# Altium PCB Clock.PcbDoc (part 1 of 2)
Units mil, origin at the board's own origin, x right, y up, seen from the top; angles counter-clockwise.
Board outline 5314.96 x 2362.2 mil, 2 copper layers (Top Layer, Bottom Layer); 149 components, 176 nets, 886 pads, 8 vias.
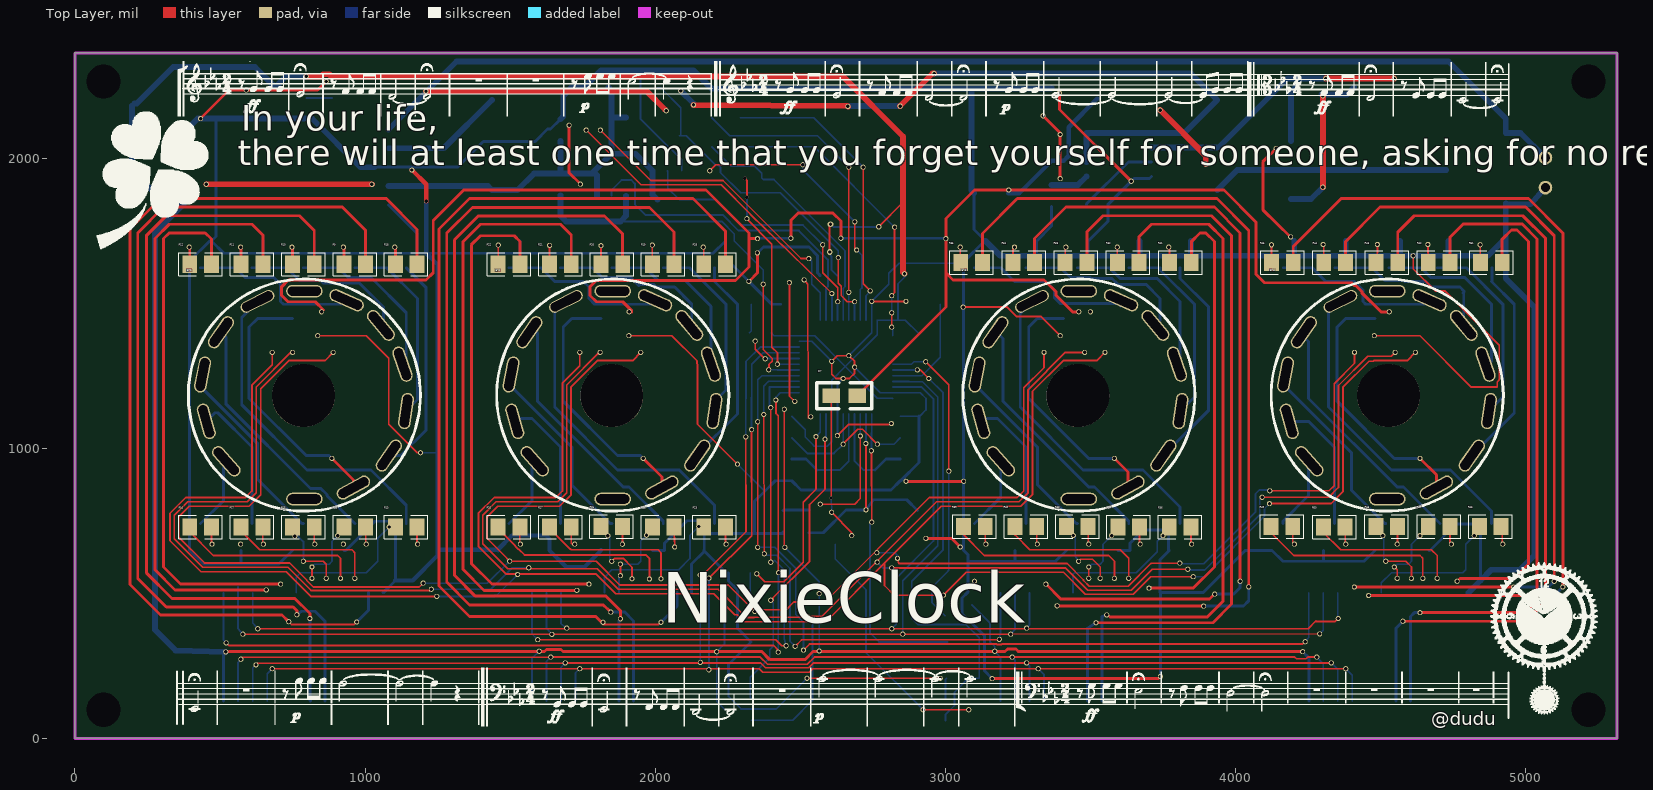
[diagram p0: Top Layer view]
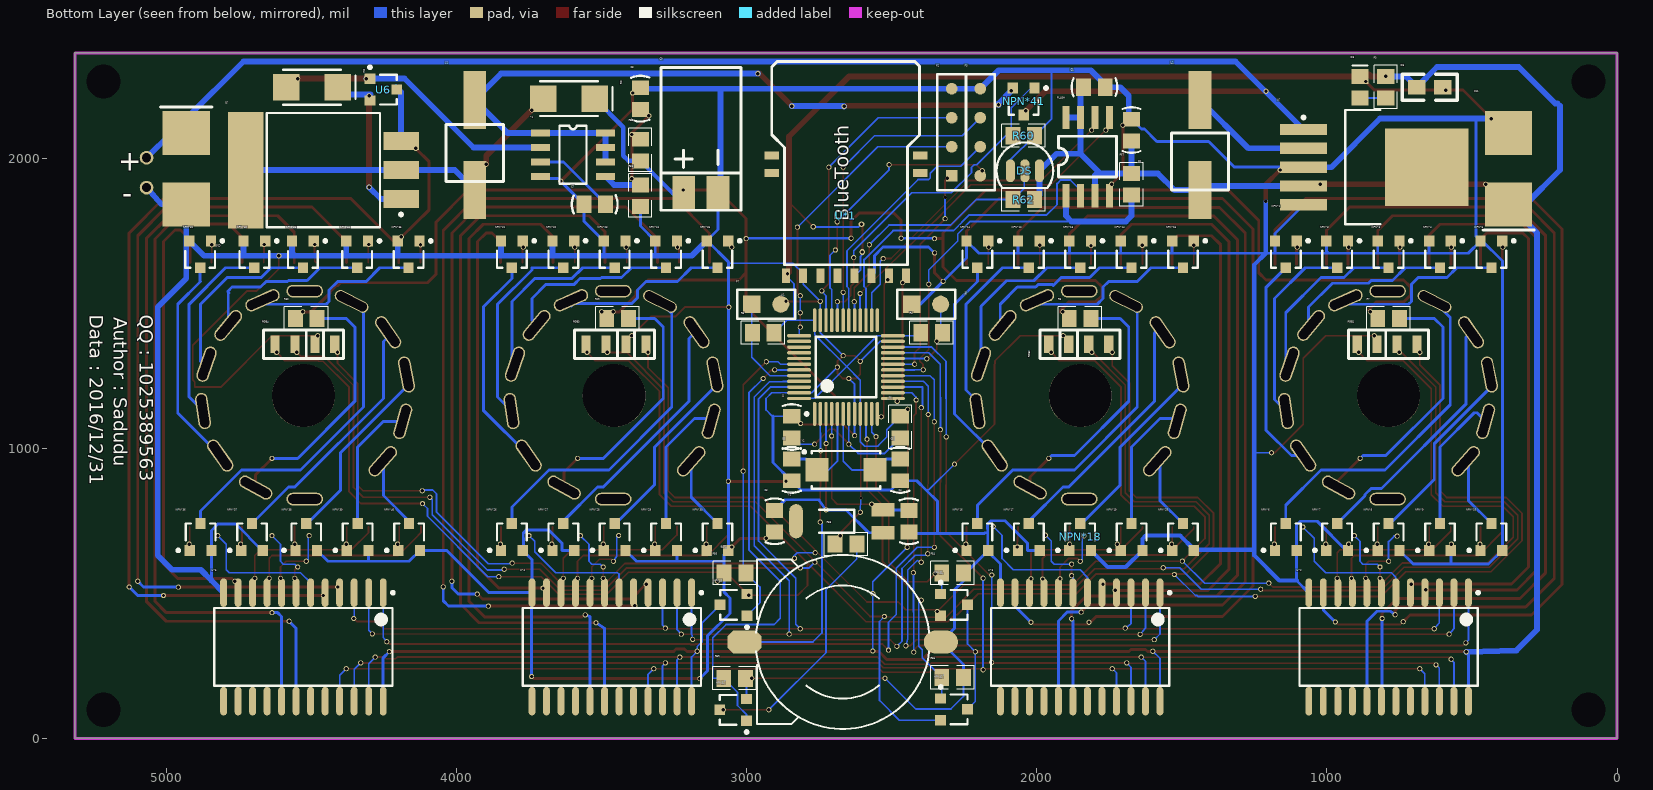
[diagram p1: Bottom Layer view, seen from below]

## Layer stack, top to bottom
Top Solder: solder mask 0.4, Solder Resist, Dk 3.5
Top Layer: signal copper 1.4
Dielectric 1: dielectric 12.6, FR-4, Dk 4.8
Bottom Layer: signal copper 1.4
Bottom Solder: solder mask 0.4, Solder Resist, Dk 3.5

## Board outline
0,0 0,2362.2 5314.96,2362.2 5314.96,0

## Design rules (kind name [scope] priority, off if disabled: settings)
Clearance [All] p1: gap=6
HoleSize [All] p1: absolutevalues=TRUE maxlimit=314.96 minlimit=1 maxpercent=80.000 minpercent=20.000
MinimumSolderMaskSliver [All] p1: minsoldermaskwidth=5
PolygonConnect [All] p1: connectstyle=Relief reliefconductorwidth=10 reliefentries=4 polygonreliefangle="90 Angle" airgapwidth=10
RoutingVias [All] p1: holewidth=28 width=50 viastyle="Through Hole" minholewidth=28 minwidth=50 maxholewidth=150 maxwidth=200
SilkToBoardRegionClearance [All] p1 off:
SilkToSilkClearance [All] p1 off: silktosilkclearance=10
SilkToSolderMaskClearance [IsPad] p1 off: minsilkscreentomaskgap=10 clearancetoexposedcopper=TRUE
SolderMaskExpansion [All] p1: expansion=4
UnpouredPolygon [All] p1: allowunpoured=FALSE
Width [All] p1: maxlimit=100 minlimit=6 preferedwidth=10
24 further rules are at their usual default settings.

## Components (designator, comment, footprint, x,y, rotation, side; value= is the part's Value field where it differs from the comment)
*1 "MC34063" SOP-8 3710.63,2086.61 r180 bottom
BAT? "BATT" BAT 2600,470 r270 bottom
C1 "Cap" C-RAD-0805 1801.18,2244.09 r0 bottom
C2 "Cap" C-RAD-0805 1673.23,2096.46 r270 bottom
C3 "Cap" C-RAD-0805 2903.54,748.03 r90 bottom
C4 "Cap" C-RAD-0805 2440.94,748.03 r90 bottom
C5 "Cap" C-RAD-0805 2470.47,925.2 r90 bottom
C6 "Cap" C-RAD-0805 2844.49,925.2 r90 bottom
C7 "Cap" C-RAD-0805 3523.62,1840.55 r0 bottom
C8 "Cap" C-RAD-0805 3366.14,2204.72 r270 bottom
C9 "Cap Pol" CAP4 3020,1820 r90 bottom
C10 "220uF" CAP7343 4931.1,1968.5 r270 bottom
C11 "220uF" CAP7343 374.02,1958.66 r90 bottom
D3 "LED0" LED_0805 885.83,2244.09 r90 bottom
D4 "Diode" DIODE-SMA 4498.03,2244.09 r180 bottom
D5 "Diode" DIODE-SMA 3612.2,2204.72 r180 bottom
D6 "Diode" 0805 600.39,2244.09 r0 bottom
D7 "Diode" 0805 2696.85,1181.1 r180 top
DS "DS18B20" TO-92A 2041,1956 r270 bottom
E*1 "SZ-8" SZ-8 787.4,1181.1 r0 top
E*2 "SZ-8" SZ-8 1850.39,1181.1 r0 top
E*3 "SZ-8" SZ-8 3456.69,1181.1 r0 top
E*4 "SZ-8" SZ-8 4519.69,1181.1 r0 top
FLASH "W25Q128" SOIC-8 1899.61,1870.08 r90 bottom
J1 "Cap" C-RAD-0805 2844.49,1072.83 r270 bottom
L1 "990uH" L55#1 4035.43,1919.29 r90 bottom
L2 "990uH" L55#2 1535.43,1889.76 r90 bottom
NPN41 "NPN_mini" SOT-23r 2290,460 r270 bottom
NPN42 "NPN_mini" SOT-23r 2290,100 r270 bottom
NPN43 "NPN_mini" SOT-23r 3040,460 r90 bottom
NPN44 "NPN_mini" SOT-23r 3041.34,98.43 r90 bottom
NPN*1 "NPN_mini" SOT-23r 1141.73,1673.23 r0 bottom
NPN*2 "NPN_mini" SOT-23r 964.57,1673.23 r0 bottom
NPN*3 "NPN_mini" SOT-23r 787.4,1673.23 r0 bottom
NPN*4 "NPN_mini" SOT-23r 610.24,1673.23 r0 bottom
NPN*5 "NPN_mini" SOT-23r 433.07,1673.23 r0 bottom
NPN*6 "NPN_mini" SOT-23r 1141.73,688.98 r180 bottom
NPN*7 "NPN_mini" SOT-23r 964.57,688.98 r180 bottom
NPN*8 "NPN_mini" SOT-23r 787.4,688.98 r180 bottom
NPN*9 "NPN_mini" SOT-23r 610.24,688.98 r180 bottom
NPN*10 "NPN_mini" SOT-23r 433.07,688.98 r180 bottom
NPN*11 "NPN_mini" SOT-23r 2204.72,1673.23 r0 bottom
NPN*12 "NPN_mini" SOT-23r 2027.56,1673.23 r0 bottom
NPN*13 "NPN_mini" SOT-23r 1850.39,1673.23 r0 bottom
NPN*14 "NPN_mini" SOT-23r 1673.23,1673.23 r0 bottom
NPN*15 "NPN_mini" SOT-23r 1496.06,1673.23 r0 bottom
NPN*16 "NPN_mini" SOT-23r 2204.72,688.98 r180 bottom
NPN*17 "NPN_mini" SOT-23r 2027.56,688.98 r180 bottom
NPN*18 "NPN_mini" SOT-23r 1850.39,688.98 r180 bottom
NPN*19 "NPN_mini" SOT-23r 1673.23,688.98 r180 bottom
NPN*20 "NPN_mini" SOT-23r 1496.06,688.98 r180 bottom
NPN*21 "NPN_mini" SOT-23r 3809.06,1673.23 r0 bottom
NPN*22 "NPN_mini" SOT-23r 3631.89,1673.23 r0 bottom
NPN*23 "NPN_mini" SOT-23r 3454.72,1673.23 r0 bottom
NPN*24 "NPN_mini" SOT-23r 3277.56,1673.23 r0 bottom
NPN*25 "NPN_mini" SOT-23r 3100.39,1673.23 r0 bottom
NPN*26 "NPN_mini" SOT-23r 3809.06,688.98 r180 bottom
NPN*27 "NPN_mini" SOT-23r 3631.89,688.98 r180 bottom
NPN*28 "NPN_mini" SOT-23r 3454.72,688.98 r180 bottom
NPN*29 "NPN_mini" SOT-23r 3277.56,688.98 r180 bottom
NPN*30 "NPN_mini" SOT-23r 3100.39,688.98 r180 bottom
NPN*31 "NPN_mini" SOT-23r 4883.54,1672.99 r0 bottom
NPN*32 "NPN_mini" SOT-23r 4696.54,1672.99 r0 bottom
NPN*33 "NPN_mini" SOT-23r 4529.21,1672.99 r0 bottom
NPN*34 "NPN_mini" SOT-23r 4342.2,1672.99 r0 bottom
NPN*35 "NPN_mini" SOT-23r 4165.04,1672.99 r0 bottom
NPN*36 "NPN_mini" SOT-23r 4881.89,688.98 r180 bottom
NPN*37 "NPN_mini" SOT-23r 4704.72,688.98 r180 bottom
NPN*38 "NPN_mini" SOT-23r 4517.72,688.98 r180 bottom
NPN*39 "NPN_mini" SOT-23r 4340.55,688.98 r180 bottom
NPN*40 "NPN_mini" SOT-23r 4163.39,688.98 r180 bottom
NPN*41 "NPN_mini" SOT-23r 2045,2200 r0 bottom
P2 "Header 4" HDR4X1_A#1 2293.31,1938.98 r90 bottom
P3 "Header 4" HDR4X1_A#2 2194.88,1938.98 r90 bottom
P6 "Header 2" HDR2X1_A 2431.1,1496.06 r180 bottom
P7 "Header 2" HDR2X1_A 2982.28,1496.06 r180 bottom
Q? "MOSFET-N" SOT263 4458.66,1958.66 r0 bottom
R3 "Res1" 0805-1 797.24,2244.09 r90 bottom
R4 "Res1" 0805-1 2362.2,1397.64 r0 bottom
R5 "Res1" 0805-1 2942.91,1397.64 r180 bottom
R6 "Res1" 0805-1 2470.47,1072.83 r90 bottom
R7 "Res1" 0805-1 787.4,1446.85 r0 bottom
R8 "Res1" 0805-1 1850.39,1446.85 r0 bottom
R9 "Res1" 0805-1 964.57,1633.86 r180 top
R10 "Res1" 0805-1 787.4,1633.86 r180 top
R11 "Res1" 0805-1 610.24,1633.86 r180 top
R12 "Res1" 0805-1 433.07,1633.86 r180 top
R13 "Res1" 0805-1 1141.73,728.35 r0 top
R14 "Res1" 0805-1 964.57,728.35 r0 top
R15 "Res1" 0805-1 787.4,728.35 r0 top
R16 "Res1" 0805-1 433.07,728.35 r0 top
R17 "Res1" 0805-1 610.24,728.35 r0 top
R18 "Res1" 0805-1 1141.73,1633.86 r180 top
R19 "Res1" 0805-1 2027.56,1633.86 r180 top
R20 "Res1" 0805-1 1850.39,1633.86 r180 top
R21 "Res1" 0805-1 1673.23,1633.86 r180 top
R22 "Res1" 0805-1 1496.06,1633.86 r180 top
R23 "Res1" 0805-1 2204.72,728.35 r0 top
R24 "Res1" 0805-1 2027.56,728.35 r0 top
R25 "Res1" 0805-1 1850,730 r0 top
R26 "Res1" 0805-1 1496.06,728.35 r0 top
R27 "Res1" 0805-1 1673.23,728.35 r0 top
R28 "Res1" 0805-1 2204.72,1633.86 r180 top
R29 "Res1" 0805-1 3444.88,1446.85 r0 bottom
R30 "Res1" 0805-1 4517.72,1446.85 r0 bottom
R32 "Res1" 0805-1 3630.16,1640 r180 top
R33 "Res1" 0805-1 3450.16,1640 r180 top
R34 "Res1" 0805-1 3270.16,1640 r180 top
R35 "Res1" 0805-1 3090.16,1640 r180 top
R36 "Res1" 0805-1 3809.06,728.35 r0 top
R37 "Res1" 0805-1 3631.83,728.35 r0 top
R38 "Res1" 0805-1 3454.61,730 r0 top
R39 "Res1" 0805-1 3100.16,730 r0 top
R40 "Res1" 0805-1 3277.38,730 r0 top
R41 "Res1" 0805-1 3810.16,1640 r180 top
R42 "Res1" 0805-1 4701.65,1639.76 r180 top
R43 "Res1" 0805-1 4521.65,1639.76 r180 top
R44 "Res1" 0805-1 4341.65,1639.76 r180 top
R45 "Res1" 0805-1 4161.65,1639.76 r180 top
R46 "Res1" 0805-1 4877.95,730.32 r0 top
R47 "Res1" 0805-1 4701.42,730 r0 top
R48 "Res1" 0805-1 4520.94,730 r0 top
R49 "Res1" 0805-1 4160,730 r0 top
R50 "Res1" 0805-1 4340.47,728.35 r0 top
R51 "Res1" 0805-1 4881.65,1639.76 r180 top
R52 "Res1" 0805-1 3366.14,2027.56 r90 bottom
R53 "Res1" 0805-1 3366.14,1870.08 r270 bottom
R54 "Res1" 0805-1 2290,570 r180 bottom
R55 "Res1" 0805-1 2290,210 r180 bottom
R56 "Res1" 0805-1 3040,570 r0 bottom
R57 "Res1" 0805-1 1673.23,1909.45 r270 bottom
R58 "Res1" 0805-1 2657.48,669.29 r180 bottom
R59 "Res1" 0805-1 3041.34,206.69 r180 bottom
R60 "Res1" 0805-1 2045,2077 r180 bottom
R62 "Res1" 0805-1 2045,1857 r180 bottom
RGB1 "RGB_LED" RGB 698.82,1358.27 r0 bottom
RGB2 "RGB_LED" RGB 1761.81,1358.27 r0 bottom
RGB3 "RGB_LED" RGB 3543.31,1358.27 r180 bottom
RGB4 "RGB_LED" RGB 4616.14,1358.27 r180 bottom
U1 "STM32F103C8T6" LQFP-48_M 2657.48,1279.53 r90 bottom
U6 "S9015" SOT-23r 4257,2236 r270 bottom
U*1 "BT1" BT1 2657.48,1948.82 r90 bottom
U*2 "CD4514" SOIC24 787.4,314.96 r270 bottom
U*3 "CD4514" SOIC24 1850.39,314.96 r270 bottom
U*4 "CD4514" SOIC24 3464.57,314.96 r270 bottom
U*5 "CD4514" SOIC24 4527.56,314.96 r270 bottom
U? "U5" TO263-5 836.61,1968.5 r180 bottom
Y1 "XTAL_SM" X-TC15 2529.53,748.03 r270 bottom
Y2 "XTAL" 5032 2657.48,925.2 r180 bottom

## Footprints (in the part's own frame and the unit in brackets; to place one, negate y for a bottom-side part, rotate by r counter-clockwise, add the part's x,y. Pads: shape width x height; smd on the part's side, far side on the other; paste and mask are expansions set on the pad)
0805 [mil]
  rect 60x50 smd: 1(0,-0.06) 2(90,-0.06)
  silkscreen extent -50,-45 140,45
0805-1 [mm] "贴片带丝印"
  rect 1.3x1.5 smd: 1(-0.95,0) 2(0.95,0)
  silkscreen extent -1.91,-1.02 1.91,1.02, body extent -1.14,-0.51 1.14,0.51, height 1
5032 [mm] "XTAL_8M 2-Leads, Body 6.00x3.20mm, IPC Medium Density"
  rect 2x2.05 smd: 1(-2.55,0) 2(2.55,0)
  silkscreen extent -3.78,-1.65 3,1.7, body extent -3,-1.6 3,1.6, height 1.2
BAT [mm]
  oct 2x3 smd: 1(3.5,-10.352)
  oval 2x3 smd: 2(3.5,6.848)
  silkscreen extent -4.12,-9.33 11.12,5.82
BT1 [mm]
  rect 0.7x1.3 smd: 1(1.5,6.5) 2(0,6.5) 21(0,-6.5) 22(1.5,-6.5)
  rect 1.3x0.7 smd: 8(-9,5.25) 9(-9,3.75) 10(-9,2.25) 11(-9,0.75) 12(-9,-0.75) 13(-9,-2.25) 14(-9,-3.75) 15(-9,-5.25)
  silkscreen extent -8.04,-6.42 9.76,6.5
C-RAD-0805 [mm] "贴片电容"
  rect 1.3x1.5 smd: 1(-0.95,0) 2(0.95,0)
  silkscreen extent -2,-0.79 2,0.79, body extent -1.27,-0.64 1.27,0.64, height 0.9
CAP4 [mm]
  rect 3x2 smd: 1(1.5,5) 2(1.5,2)
  silkscreen extent 0,0 12.5,7
CAP7343 [mm] "Aluminum Electrolytic Capacitor, Body 7.15x4.40x4.00mm, IPC Low Density"
  rect 3.85x4.15 smd: 1(-3,0) 2(3.25,0)
  silkscreen extent -5.25,-2.25 -5.25,2.25, body extent -3.65,-2.25 3.65,2.25, height 4
DIODE-SMA [mm] "贴片二极管"
  rect 2.3x2.3 smd: 1(-2.25,0) 2(2.25,0)
  silkscreen extent -2.54,-1.52 3.81,1.52, body extent -2.92,-1.4 2.92,1.4, height 3
HDR2X1_A [mm] "Connector; Header; 2 Position"
  rect 1.5x1.5 smd: 1(0,0)
  round 1.5 smd: 2(2.54,0)
  silkscreen extent -1.27,-1.27 3.81,1.27
HDR4X1_A#1 [mil] "Connector; Header; 4 Position"
  rect 40x40 smd: 1(0,0)
  round 40 smd: 2(100,0) 3(200,0) 4(300,0)
  silkscreen extent -50,-50 350,50
HDR4X1_A#2 [mil] "Connector; Header; 4 Position"
  round 40 smd: 1(0,0) 2(100,0) 3(200,0) 4(300,0)
  silkscreen extent -50,-50 350,50
L55#1 [mm]
  rect 5.08x2 smd: 1(-0.744,-2.5) 2(7.13,-2.5)
  silkscreen extent 0,-5 5,0
L55#2 [mm]
  rect 5.08x2 smd: 1(0,-2.5) 2(7.874,-2.5)
  silkscreen extent 0,-5 5,0
LED_0805 [mm] "贴片二极管"
  rect 1.3x1.5 smd: 1(-0.95,0) 2(0.95,0)
  silkscreen extent 1.91,-0.64 1.91,0.63
LQFP-48_M [mm] "Thin QFP, 48-Leads, Body 7x7mm, Pitch 0.5mm, IPC Low Density"
  oval 2.1x0.3 smd: 1(-4.1,2.75) 2(-4.1,2.25) 3(-4.1,1.75) 4(-4.1,1.25) 5(-4.1,0.75) 6(-4.1,0.25) 7(-4.1,-0.25) 8(-4.1,-0.75) 9(-4.1,-1.25) 10(-4.1,-1.75) 11(-4.1,-2.25) 12(-4.1,-2.75) 25(4.1,-2.75) 26(4.1,-2.25) 27(4.1,-1.75) 28(4.1,-1.25) 29(4.1,-0.75) 30(4.1,-0.25) 31(4.1,0.25) 32(4.1,0.75) 33(4.1,1.25) 34(4.1,1.75) 35(4.1,2.25) 36(4.1,2.75)
  oval 0.3x2.1 smd: 13(-2.75,-4.1) 14(-2.25,-4.1) 15(-1.75,-4.1) 16(-1.25,-4.1) 17(-0.75,-4.1) 18(-0.25,-4.1) 19(0.25,-4.1) 20(0.75,-4.1) 21(1.25,-4.1) 22(1.75,-4.1) 23(2.25,-4.1) 24(2.75,-4.1) 37(2.75,4.1) 38(2.25,4.1) 39(1.75,4.1) 40(1.25,4.1) 41(0.75,4.1) 42(0.25,4.1) 43(-0.25,4.1) 44(-0.75,4.1) 45(-1.25,4.1) 46(-1.75,4.1) 47(-2.25,4.1) 48(-2.75,4.1)
  silkscreen extent -4.22,-2.65 2.65,3.57, body extent -3.5,-3.5 3.5,3.5, height 1.6
RGB [mm]
  rect 0.8x1.5 smd: 1(-0.25,0) 2(1.5,0) 3(3.25,0) 4(5,0)
  silkscreen extent -1.25,-1.25 5.75,1.25
SOIC24 [mm] "SOIC, 24-Leads, Body 15.40x7.50mm, Pitch 1.27mm, IPC Medium Density"
  oval 2.5x0.6 smd: 1(-4.75,6.985) 2(-4.75,5.715) 3(-4.75,4.445) 4(-4.75,3.175) 5(-4.75,1.905) 6(-4.75,0.635) 7(-4.75,-0.635) 8(-4.75,-1.905) 9(-4.75,-3.175) 10(-4.75,-4.445) 11(-4.75,-5.715) 12(-4.75,-6.985) 13(4.75,-6.985) 14(4.75,-5.715) 15(4.75,-4.445) 16(4.75,-3.175) 17(4.75,-1.905) 18(4.75,-0.635) 19(4.75,0.635) 20(4.75,1.905) 21(4.75,3.175) 22(4.75,4.445) 23(4.75,5.715) 24(4.75,6.985)
  silkscreen extent -4.87,-7.8 3.4,7.96, body extent -3.8,-7.8 3.8,7.8, height 2.65
SOIC-8 [mil]
  rect 80x24 smd: 1(0,0) 2(0,-50.06) 3(0,-100.06) 4(0,-150.06) 5(270,-150) 6(270,-100) 7(270,-50) 8(270,0)
  silkscreen extent 65,-175 205,25
SOP-8 [mil]
  rect 65x25 smd: 1(0,0) 2(0,-50) 3(0,-100) 4(0,-150) 5(224.41,-150) 6(224.41,-100) 7(224.41,-50) 8(224.41,0)
  silkscreen extent 65,-175 159,25
SOT263 [mm]
  rect 3.1x1.6 smd: D(-6.8,0) G(-6.8,2.54) S(-6.8,-2.54)
  rect 3.1x10.2 smd: D(6.8,0)
  silkscreen extent -6.92,-5 4.95,5, body extent -4.5,-5 4.5,5, height 4
SOT-23r [mm]
  rect 0.9x0.95 smd: 1(-0.95,-1.048) 2(0.95,-1.048) 3(0,1.302)
  silkscreen extent -2.07,-1.17 1.3,1.3
SZ-8 [mm]
  oval 3.2x1.1 hole 0.8 slot 2.9 at 0 deg: 1(0.081,-9.051) 8(0.081,9.149)
  oval 3.2x1.1 hole 0.8 slot 2.9 at 29 deg rot 29: 2(4.381,-8.051)
  oval 3.2x1.1 hole 0.8 slot 2.9 at 55 deg rot 55: 3(7.481,-5.251) 10(-7.219,5.549)
  oval 3.2x1.1 hole 0.8 slot 2.9 at 82 deg rot 82: 4(8.981,-1.351)
  oval 3.2x1.1 hole 0.8 slot 2.9 at 109 deg rot 109: 5(8.681,2.749)
  oval 3.2x1.1 hole 0.8 slot 2.9 at 130 deg rot 130: 6(6.781,6.149)
  oval 3.2x1.1 hole 0.8 slot 2.9 at 156 deg rot 156: 7(3.781,8.349)
  oval 3.2x1 hole 0.8 slot 2.9 at 27 deg rot 27: 9(-4.019,8.249)
  oval 3.2x1.1 hole 0.8 slot 2.9 at 79 deg rot 79: 11(-8.819,1.849)
  oval 3.2x1.1 hole 0.8 slot 2.9 at 106 deg rot 106: 12(-8.5,-2.25)
  oval 3.2x1.1 hole 0.8 slot 2.9 at 132 deg rot 132: 13(-6.75,-5.75)
  silkscreen extent -10.08,-10.11 10.24,10.21
TO263-5 [mm] "D2-PAK, 6-Pads, Body 7.60x8.36mm (max), IPC Medium Density"
  rect 4.1x1 smd: 1(-6.2,3.3) 2(-6.2,1.65) 3(-6.2,0) 4(-6.2,-1.65) 5(-6.2,-3.3)
  rect 7.3x6.8 smd: 6(4.6,0)
  silkscreen extent -6.32,-5 0.55,5, body extent -2.55,-5 6.45,5, height 4.5
TO-92A [mm]
  oval 2x0.8 smd: 1(0,-1.27) 2(0,0) 3(0,1.27)
  silkscreen extent -2.48,-2.48 1.5,2.48
X-TC15 [mm] "圆柱晶振1"
  rect 1.2x2 smd: 1(-1,0) 2(1,0)
  oval 3x1.2 smd: 3(0,-7.62)
  silkscreen extent -1.02,-5.59 1.02,-2.54, body extent -1,-8.29 1,0, height 1.99

## Part data
BAT?: library part BAT
C1 C2 C3 C4 C5 C6 C7 C8 J1: "无极性电容"
C9: "极性电解电容"
C10 C11: library part CAP
D3: "发光二极管"
D4 D5 D6 D7: "二极管"
DS: "温度传感器"
FLASH: library part W25X16, "W25X16;SST25VF016;MX25L1605"
L1 L2: library part L_SOP
P2 P3 P6 P7: "接插件"
Q?: "N-Channel MOSFET"
R3 R4 R5 R6 R7 R8 R9 R10 R11 R12 R13 R14 R15 R16 R17 R18 R19 R20 R21 R22 R23 R24 R25 R26 R27 R28 R29 R30 R32 R33 R34 R35 R36 R37 R38 R39 R40 R41 R42 R43 R44 R45 R46 R47 R48 R49 R50 R51 R52 R53 R54 R55 R56 R57 R58 R59 R60 R62: "贴片电阻"
U1: "STM32 ARM-based 32-bit MCU with 64 Kbytes Flash, 48-pin LQFP, Industrial Temperature"
U?: library part LM2596
Y1: "圆柱晶振"
Y2: "晶振"

## Free pads (board coordinates)
  round 17.72 hole 118.11: 0(98.43,2263.78) 1(98.43,98.43) 2(5216.54,98.43) 3(5216.54,2263.78)
  round 17.72 hole 11.81: 0(579,359) 0(850,1470) 0(1980,549) 0(2185,552) 0(2903.54,1269.68) 0(2932,1298) 0(3395.67,2081) 1(630,377.5) 1(1910,1470) 1(2020,550) 1(2155,563) 1(3012,921) 1(3393,2224) 2(520,298) 2(2185.04,236.22) 2(2585,1031) 2(2942.91,1240.16) 2(3500,1470) 2(3640.47,1920) 2(4921.26,669.29) 3(572,272.62) 3(2155.51,261.81) 3(2445,1134) 3(2554,1040) 3(2923.23,98.43) 3(4530,1470) 3(4744.09,669.29) 4(624,253) 4(2378.94,1308.07) 4(2447,658) 4(2565,499) 4(3080.71,98.43) 4(3460,1470) 4(4557.09,669.29) 5(680,240) 5(680,1330) 5(2344.49,1369.09) 5(2350,567) 5(2565,301) 5(2608,779) 5(4379.92,669.29) 6(750,1330) 6(797.24,2281.5) 6(885.83,964.57) 6(2398,476) 6(2416,1166) 6(2677.17,698.82) 6(4202.76,669.29) 6(4231.25,298.75) 7(452.76,1909.45) 7(890,1330) 7(1958.66,964.57) 7(2398,1140) 7(2859,1601) 7(3848.43,669.29) 7(4280,280) 8(1023.62,1909.45) 8(1210,2230) 8(1740,1330) 8(2374,1116) 8(3161,206) 8(3582.68,964.57) 8(3671.26,669.29) 8(4330,260) 9(866.14,551.18) 9(1810,1330) 9(2132,2183) 9(2353,1091) 9(3494.09,669.29) 9(3741,213) 9(4301.18,1899.61) 9(4380,240) 9(4635.83,964.57) 10(915.35,551.18) 10(1600,300) 10(1950,1330) 10(2707,1042) 10(2961,2291) 10(3316.93,669.29) 10(4140,2033) 10(4301.18,2214.57) 11(964.57,551.18) 11(1640,280) 11(2726,1016) 11(3139.76,669.29) 11(3340,1330) 11(4190,1728) 11(4547.24,2273.62) 12(472.44,669.29) 12(1690,260) 12(2745,991) 12(2844,2179) 12(3051.18,1692.91) 12(3480,1330) 12(4311.02,2273.62) 13(570.87,669.29) 13(1740,240) 13(2568.9,807.09) 13(2664,2178) 13(3238.19,1692.91) 13(3336.61,2145.67) 13(3550,1330) 14(649.61,669.29) 14(2088,2232) 14(2424,297) 14(2726.38,787.4) 14(3320,240) 14(3395.67,1929.13) 14(3415.35,1692.91) 14(4410,1330) 15(826.77,669.29) 15(2038,2163) 15(3218.5,1889.76) 15(3280,260) 15(3592.52,1692.91) 15(4550,1330) 16(433.07,2135.83) 16(925.2,669.29) 16(2312.1,1039) 16(3230,280) 16(3769.69,1692.91) 16(4620,1330) 17(590.55,2234.25) 17(1003.94,669.29) 17(2332,1064) 17(2629,1505) 17(2765.75,1013.78) 17(3170,300) 17(4124,1701) 18(521.2,328.8) 18(866.14,2263.78) 18(2631,1657) 18(2647.64,1013.78) 18(4302,1702) 19(1161.42,1958.66) 19(1181.1,669.29) 19(2577,1701) 19(4354,413) 19(4489,1702) 20(1082.68,728.35) 20(2425,571) 20(2687,1505) 20(4290,360) 20(4663,1702) 21(816.93,551.18) 21(1595,340) 21(2398,607) 21(2523,207) 21(2694,1683) 21(4843,1701) 22(787.4,610.24) 22(2376,636) 22(2688,1780) 22(2982.28,206.69) 22(3533.46,551.18) 23(816.93,590.55) 23(2353,658) 23(2509,1977) 23(3494.09,551.18) 23(4240,333) 24(905.51,698.82) 24(2188,1956) 24(2451,319) 24(3100.39,541.34) 24(3186,341) 24(3441,699) 25(659.45,511.5) 25(758,697) 25(2511,304) 25(2933.07,688.98) 25(3572.83,698.82) 26(393.7,1692.91) 26(708.66,531.5) 26(2482,317) 26(3051.18,659.45) 26(4507.87,698.82) 27(570.87,1692.91) 27(810,413) 27(2815,377.5) 27(2864.17,885.83) 27(4635.83,698.82) 28(748.03,1692.91) 28(2853.35,359.25) 28(3062.99,885.83) 28(4606.3,551.18) 29(765,426) 29(925.2,1692.91) 29(2627.95,1043.31) 29(2746.06,745.08) 29(4557.09,551.18) 30(971,401) 30(1102.36,1692.91) 30(2525,420) 30(2814,1085) 30(4645.67,551.18) 31(737,402) 31(2667.32,1318.9) 31(2993.11,493.11) 31(4694.88,551.18) 32(1695,380) 32(2343,437) 32(2687.01,1279.53) 32(4822.83,698.82) 33(1644,358) 33(2211.61,298.23) 33(2647.64,1240.16) 33(3582.68,551.18) 34(2513,1580) 34(2608.27,1299.21) 34(3280,380) 34(3631.89,551.18) 35(2462.6,1570.87) 35(2746.06,1505.91) 35(3225,359) 35(3750,698.82) 36(2536,1108) 36(2864.17,1505.91) 36(4517.72,610.24) 37(2481,1161) 37(3395.67,1387.8) 37(4547.24,590.55) 38(1200,535) 38(3459,610) 38(4478.35,1387.8) 39(1228.35,513.78) 39(1909.45,1387.8) 39(3494.09,590.55) 40(836.61,1387.8) 40(1247.05,489.17) 40(1535.43,669.29) 40(4015.75,541.34) 41(1525.59,564.58) 41(1722.44,669.29) 41(4045.59,521.97) 41(4612,1663) 42(1564,588) 42(3061.02,1486.22) 43(1498,611) 43(2066.93,659.45) 43(2283.46,944.88) 43(3556.1,425.2) 44(1190.94,984.25) 44(2244.09,669.29) 44(3519.02,398.31) 44(3701.77,517.72) 45(1459,1700) 45(1742.13,1910) 45(3928.15,497.05) 45(4118,853.03) 46(1636,1699) 46(1703,2113) 46(3889.76,455.71) 46(4091.54,830.71) 47(1761.81,2096.46) 47(1813,1698) 47(3346.46,531.5) 47(4117,809) 48(1811.02,2096.46) 48(1990,1700) 48(3384.84,456.69) 48(3808,604) 49(2165.35,1692.91) 49(2529.53,1653.54) 49(3835.63,582.68) 49(5098.43,541.34) 50(1771.65,531.5) 50(2609,1533) 50(3854,557.13) 50(5127.95,521.65) 51(1730,510) 51(2372.05,1564.96) 51(2835,620) 51(4635.83,433.07) 52(2391,1270) 52(2814.96,587.36) 52(4576.77,403.54) 53(2421.26,1289.37) 53(2763.78,639.76) 54(2316,1791) 54(2764.76,607.28) 55(1880,412) 55(2667.32,1968.5) 56(1847,435) 56(2716.54,1968.5) 56(4958.16,521) 57(2824.8,1761.81) 57(5009.84,492.13) 58(1820,400) 58(2667.32,1537) 58(4409.45,521.65) 59(2020,400) 59(2741,1542) 59(4458.66,492.13) 60(2814.96,1525.59) 60(4763.78,541.34) 61(1970,700) 61(2814.96,1466.54) 62(2150,730) 62(2814.96,1417.32) 63(1879.92,600.39) 63(2352.36,1722.44) 64(1879.92,561.02) 64(2467.47,1723.44) 65(2640,1723.44) 66(1887,669) 66(3001.97,1722.44) 67(1837,698) 68(1850,610) 69(1920,550) 69(2352,1673) 70(2322.83,1574.8)
  round 47.24 hole 31.5: 1(5068,1898) 2(5068,2001)
  round 11.81 hole 11.81: 20(1210.63,1850.39)
  round 216.54 hole 216.54: 36(787.4,1181.1) 37(1850.39,1181.1) 38(3456.69,1181.1) 39(4527.56,1181.1)

## Via types
v1: diameter 19.68, hole 11.81, Top Layer to Bottom Layer, 3 vias
v2: diameter 11.81, hole 11.81, Top Layer to Bottom Layer, 3 vias
v3: diameter 17.72, hole 11.81, Top Layer to Bottom Layer, 2 vias

## Nets (pads, with @x,y where several pads share a name; then routed paths per layer and width w, separated by ;. In a path a pad name is that pad's centre, name@x,y a point inside that pad or via, vN(x,y) a via of type N, cw(c..) or ccw(c..) an arc to the next point about the centre after c; other vN are vias at no path point)
3.3V: C1.2 C2.2 C11.1 D6.2 DS.3 FLASH.3 FLASH.7 FLASH.8 L2.1 NPN41.3 NPN42.3 NPN43.3 pad.2@520,298 pad.3@2445,1134 pad.4@2447,658 pad.4@2565,499 pad.5@2565,301 pad.6@797.24,2281.5 pad.6@4231.25,298.75 pad.7@452.76,1909.45 pad.7@2859,1601 pad.8@1023.62,1909.45 pad.10@1600,300 pad.17@3170,300 pad.33@2211.61,298.23 R3.2 R4.2 R5.2 R6.2 R57.1 R62.2 U1.9 U1.24 U1.36 U1.48 U*1.8 U*1.12 U*2.24 U*3.24 U*4.24 U*5.24 U?.4 | length 15630.3
  Top Layer w6: pad.4@2445,658 pad.3@2445,1134 ; v1(2601,1676) 2601,1769 v1(2604,1772) ; v1(2770,1763) 2854,1847 2854,1849
  Top Layer w10: pad.2@520,298 531.25,298.75 571.88,298.75 572.13,299 587.87,299 588.12,298.75 1618,298.75 1625,305.75 1675.25,305.75 1682.25,298.75 2367.25,298.75 2395,271 2516.25,271 2544,298.75 3205.75,298.75 3215,308 3243,308 3250,301 3250,298.75 pad.6@4231.25,298.75
  Top Layer w20: pad.7@452.76,1909.45 pad.8@1023.62,1909.45 ; pad.6@797.24,2281.5 848.7,2281.5 855.85,2288.64 876.44,2288.64 883.58,2281.5 2646.5,2281.5 2854,2074 2854,1849 ; 2854,1847 2854,1606 pad.7@2859,1601
  Bottom Layer w6: U*3.24@1575.39,127.95 1575.39,275.39 pad.10@1600,300 ; NPN42.3@2238.74,100 2211.61,127.13 pad.33@2211.61,298.23 2238.74,325.35 NPN41.3@2238.74,460 ; R4.2@2399.61,1397.64 2409.45,1387.8 U1.24@2496.06,1387.8 2496.75,1387.11 2549.9,1387.11 2655.51,1281.5 ; pad.4@2447,658 2565,540 pad.4@2565,499 pad.5@2565,301 ; R6.2@2470.47,1110.24 2516.73,1063.98 2516.73,1038.39 2524.58,1030.54 2540.27,1014.85 2548.12,1007 2593,1007 2608.27,1022.27 U1.9@2608.27,1118.11 2608.27,1234.25 2655.51,1281.5 ; v1(2601,1676) 2601,1667.32 2607.18,1661.14 2607.18,1615.26 U*1.12@2627.95,1594.49 ; v1(2604,1772) 2613.86,1762.14 2769.86,1762.14 v1@2770,1762 ; U1.48@2818.9,1171.26 2818.9,1171.95 2765.06,1171.95 2655.51,1281.5 ; U*1.8@2864.17,1594.49 2836.61,1566.93 2836.61,1440.94 ; R5.2@2905.51,1397.64 2862.2,1440.94 2836.61,1440.94 ; NPN43.3@3091.26,460 3153.5,397.76 3153.5,333.17 3170,316.67 pad.17@3170,300 3189.57,280.43 U*4.24@3189.57,127.95 ; 2655.51,1281.5 2765.06,1391.04 2765.06,1440.26 U1.36@2765.75,1440.94 2836.61,1440.94
  Bottom Layer w10: U*2.24@512.4,127.95 512.4,287.4 pad.2@520,298 ; pad.6@4231.25,298.75 4252.56,277.44 U*5.24@4252.56,127.95
  Bottom Layer w20: pad.2@520,298 347.11,302.5 275.59,374.02 275.59,1742.13 C11.1@374.02,1840.55 314.96,1840.55 196.85,1958.66 196.85,2179.85 205,2188 213,2188 339,2314 620.55,2314 D6.2@690.39,2244.16 727.73,2281.5 pad.6@797.24,2281.5 ; U?.4@1080.71,1903.54 1423.23,1903.54 L2.1@1437.01,1889.76 1525.59,1889.76 1582.68,1946.85 R57.1@1673.23,1946.85 ; C2.2@1673.23,2059.06 R57.1@1673.23,1946.85 ; FLASH.3@1799.54,1870.08 1799.54,1940.62 1793.31,1946.85 1781.5,1946.85 ; C1.2@1838.58,2244.09 1849.61,2233.07 FLASH.7@1849.61,2140.08 ; FLASH.8@1899.61,2140.08 FLASH.7@1849.61,2140.08 ; R62.2@2007.6,1857 1991,1873.6 DS.3@1991,1956 1932.04,2014.96 1849.61,2014.96 ; R57.1@1673.23,1946.85 1781.5,1946.85 ; 1781.5,1946.85 1849.61,2014.96 ; 1849.61,2014.96 FLASH.7@1849.61,2140.08
8M: C6.2 U1.5 Y2.1 | length 348.6
  Bottom Layer w6: U1.5@2687.01,1118.11 2687.01,954.72 2716.54,925.2 Y2.1@2757.87,925.2
  Bottom Layer w10: Y2.1@2757.87,925.2 2795.28,962.6 C6.2@2844.49,962.6
12V: C10.1 NPN*41.3 pad.2@5068,2001 pad.8@1210,2230 pad.15@2038,2163 U?.1 | length 5100.6
  Top Layer w20: pad.8@1210,2230 1971,2230 pad.15@2034,2167
  Bottom Layer w20: U?.1@1080.71,2098.43 1314.96,2332.68 4734.25,2332.68 4931.1,2135.83 C10.1@4931.1,2086.61 4982.39,2086.61 pad.2@5068,2001
12V_IN: *1.1 *1.6 *1.7 *1.8 L1.2 NPN*41.2 pad.9@2132,2183 pad.10@2961,2291 pad.12@2844,2179 pad.13@2664,2178 pad.14@2088,2232 | length 2556.3
  Top Layer w20: pad.9@2132,2183 2663,2179 pad.13@2665,2177 ; pad.12@2844,2179 2956,2291 pad.10@2961,2291
  Bottom Layer w20: pad.14@2088,2232 2132,2188 pad.9@2132,2183 ; pad.13@2664,2178 2665,2179 pad.12@2844,2179 ; pad.10@2961,2291 3846.01,2291 L1.2@3937.01,2200 3823.62,2086.61 *1.1@3710.63,2086.61 *1.8@3486.22,2086.61 *1.7@3486.22,2036.61 *1.6@3486.22,1986.61
32K: C3.2 pad.11@2726,1016 pad.14@2726.38,787.4 U1.3 Y1.2 | length 778
  Top Layer w6: pad.11@2726,1016 pad.14@2726.38,787.4
  Bottom Layer w6: pad.11@2726.38,1023.62 pad.11@2726,1016 U1.3@2726.38,1118.11
  Bottom Layer w10: Y1.2@2529.53,708.66 2578.74,708.66 2657.48,787.4 pad.14@2726.38,787.4 2751.22,822.09 2866.89,822.09 C3.2@2903.54,785.43
170V: C9.1 D5.2 D7.1 pad.0@850,1470 pad.1@1910,1470 pad.2@3500,1470 pad.3@4530,1470 pad.4@3460,1470 pad.15@3218.5,1889.76 pad.63@2352.36,1722.44 pad.64@2467.47,1723.44 pad.65 pad.66@3001.97,1722.44 R7.2 R8.2 R29.2 R30.2 R52.1 | length 7450.3
  Top Layer w10: pad.0@850,1470 856.36,1476.36 828.08,1504.65 734.07,1504.65 712.6,1526.12 712.6,1556.48 736.12,1580 1210,1580 1234.92,1604.92 1234.92,1784.92 1340,1890 2174.96,1890 2322.83,1742.13 2322.83,1722.44 ; pad.1@1910,1470 1919,1470 1919,1473.73 1888.08,1504.65 1797.06,1504.65 1775.59,1526.12 1775.59,1556.48 1797.06,1577.95 2276.77,1577.95 2322.83,1624.02 2322.83,1722.44 ; pad.63@2352.36,1722.44 2322.83,1722.44 ; pad.64@2467.47,1723.44 2467.47,1785.47 2492,1810 2613,1810 2640,1783 pad.65@2640,1723.44 ; D7.1@2696.85,1181.17 3001.97,1486.28 3001.97,1604.33 ; pad.4@3460,1470 3438.01,1470 3381.89,1526.12 3381.89,1538.11 3340,1580 3026.3,1580 3001.97,1604.33 ; pad.3@4530,1470 4501,1470 4435.31,1535.69 4435.31,1540.13 4414.65,1560.79 4409.21,1560.79 4400,1570 4100,1570 4070,1600 4070,1780 3960,1890 3100,1890 3001.97,1791.97 3001.97,1604.33
  Bottom Layer w10: pad.63@2352.36,1722.44 pad.64@2467.47,1723.44 ; pad.65@2640,1723.44 pad.66@3001.97,1722.44
  Bottom Layer w15: C9.1@3216.85,1879.06 3255.04,1879.06 R52.1@3366.14,1990.16 3407.48,1990.16 3425.2,2007.87 3425.2,2106.3 D5.2@3523.62,2204.72
B: NPN43.2 pad.5@680,1330 pad.8@1740,1330 pad.13@3550,1330 pad.16@4620,1330 pad.31@2993.11,493.11 pad.40@1247.05,489.17 pad.41@1525.59,564.58 pad.47@4117,809 pad.50@3854,557.13 RGB1.1 RGB2.1 RGB3.1 RGB4.1 | length 8576.9
  Top Layer w6: pad.5@680,1330 680,1286.92 610,1216.92 610,852.43 587.57,830 382.1,830 327.58,775.48 327.58,681.21 434.46,574.33 728.02,574.33 813.18,489.17 pad.40@1247.05,489.17 ; pad.8@1740,1330 1740,1283.93 1680,1223.93 1680,852.43 1657.57,830 1445.09,830 1390.57,775.48 1390.57,661.59 1486.22,565.94 1796.77,565.94 1864.17,498.54 2201.26,498.54 2273.62,426.18 2282.92,426.18 2306.96,402.14 2588.36,402.14 2789.37,603.15 ; pad.13@3550,1330 3521.87,1301.87 3406.67,1301.87 3300,1195.2 3300,840 3260,800 2986.22,800 2789.37,603.15 ; pad.50@3854,557.13 3707.72,557.13 3647.59,497 3482.51,497 3407.15,572.36 3072.36,572.36 pad.31@2993.11,493.11 2823.82,493.11 2790.35,526.57 2790.35,602.17 2789.37,603.15 ; pad.47@4117,809 4329.06,809.06 4370,850 4370,1210 4460,1300 4475.67,1300 4477.54,1301.87 4591.87,1301.87 pad.16@4620,1330
  Bottom Layer w6: pad.40@1247.05,489.17 1443.9,489.17 1446.85,492.13 1453.13,492.13 pad.41@1525.59,564.58 ; pad.50@3854,557.13 3891.78,557.13 4100,765.35 4100,792 pad.47@4117,809
B_CTRL: NPN43.1 pad.0@2932,1298 pad.1@3012,921 R56.1 U1.42 | length 1068
  Top Layer w6: pad.0@2932,1298 3012,1218 pad.1@3012,921
  Bottom Layer w6: U1.42@2818.9,1289.37 2883.37,1289.37 2892,1298 pad.0@2932,1298 ; NPN43.1@2998.74,422.6 2953.74,467.6 2953.74,521.14 R56.1@3002.6,570 3012,579.4 pad.1@3012,921
BOOT0: P7.1 R5.1 U1.44 | length 372.5
  Bottom Layer w6: U1.44@2818.9,1250 2919.29,1250 2982.28,1312.99 P7.1@2982.28,1496.06
BT_RX: pad.34@2513,1580 pad.36@2536,1108 U1.12 U*1.14 | length 481.8
  Top Layer w6: pad.34@2513,1580 2525.94,1565.1 2527.57,1103
BT_TX: pad.35@2462.6,1570.87 pad.37@2481,1161 U1.13 U*1.15 | length 417.5
  Top Layer w6: pad.35@2462.6,1570.87 2462.6,1179.4 pad.37@2481,1161
D1: pad.0@579,359 pad.20@4290,360 pad.28@2853.35,359.25 pad.33@1644,358 pad.35@3225,359 U1.45 U*2.2 U*3.2 U*4.2 U*5.2 | length 5427.8
  Top Layer w6: pad.0@579,359 pad.33@1644,358 pad.35@3225,359 pad.20@4290,360
  Bottom Layer w6: U*2.2@562.4,521.97 U*2.2@562.4,501.97 562.4,377.6 pad.0@579,359 ; U*3.2@1625.39,501.97 1625.39,379.61 pad.33@1644,358 ; pad.28@2853.35,359.25 2853.35,543.31 2973.66,663.62 2973.66,1176.49 2921.11,1229.04 2820.18,1229.04 U1.45@2818.9,1230.32 2875.54,1230.32 ; pad.35@3225,359 3239.57,374.57 U*4.2@3239.57,501.97 ; pad.20@4290,360 4302.56,372.56 U*5.2@4302.56,501.97
D2: pad.1@630,377.5 pad.19@4354,413 pad.27@2815,377.5 pad.32@1695,380 pad.34@3280,380 U1.46 U*2.3 U*3.3 U*4.3 U*5.3 | length 5227.5
  Top Layer w6: pad.1@630,377.5 pad.27@2815,377.5 4250,377.5 4277,404.5 4277,403 4344,403 pad.19@4354,413
  Bottom Layer w6: U*2.3@612.4,501.97 612.4,397.6 pad.1@630,377.5 ; U*3.3@1675.39,501.97 1675.39,394.61 pad.32@1695,380 ; pad.27@2815,377.5 2830.96,393.46 2830.96,401 2830.71,552.17 2958.66,680.12 2958.66,1170.28 2918.31,1210.63 U1.46@2818.9,1210.63 ; pad.34@3280,380 3289.57,389.57 U*4.3@3289.57,501.97 ; pad.19@4352.56,413 U*5.3@4352.56,501.97
D3: pad.0@2185,552 pad.2@2185.04,236.22 pad.5@680,240 pad.9@4380,240 pad.13@1740,240 pad.14@3320,240 pad.17@2332,1064 U1.21 U*2.21 U*3.21 U*4.21 U*5.21 | length 5483.2
  Top Layer w6: pad.5@680,240 pad.13@1740,240 2359,240 2371,228 2531,228 2543,240 pad.14@3320,240 pad.9@4380,240 ; pad.0@2185,552 2332.68,698.82 pad.17@2332,1064
  Bottom Layer w6: U*2.21@662.4,127.95 662.4,222.4 pad.5@680,240 ; U*3.21@1725.39,127.95 1725.39,225.39 pad.13@1740,240 ; pad.0@2185,552 pad.2@2185.04,236.22 ; pad.17@2332,1064 2332.68,1289.37 2372.05,1328.74 U1.21@2496.06,1328.74 ; pad.14@3320,240 3339.57,220.43 U*4.21@3339.57,127.95 ; pad.9@4380,240 4402.56,217.44 U*5.21@4402.56,127.95
D4: pad.1@2155,563 pad.3@2155.51,261.81 pad.4@624,253 pad.8@4330,260 pad.12@1690,260 pad.15@3280,260 pad.16@2312.1,1039 U1.22 U*2.22 U*3.22 U*4.22 U*5.22 | length 5585.7
  Top Layer w6: pad.4@624,253 629.99,259 pad.12@1690,260 2363,260 2380,243 2529,243 2546,260 pad.15@3280,260 pad.8@4330,260 ; pad.1@2155,563 2163.98,563 2312.98,712 pad.16@2312.1,1039
  Bottom Layer w6: U*2.22@612.4,127.95 612.4,242.4 pad.4@624,253 ; U*3.22@1675.39,127.95 1675.39,245.39 pad.12@1690,260 ; pad.1@2155,563 pad.3@2155.51,261.81 pad.3@2155.51,255.91 ; pad.16@2312.1,1039 2312.99,1299.21 2362.2,1348.43 U1.22@2496.06,1348.43 ; pad.15@3280,260 3289.57,250.43 U*4.22@3289.57,127.95 ; pad.8@4330,260 4352.56,237.44 U*5.22@4352.56,127.95
D_CTRL: NPN44.1 pad.0@2903.54,1269.68 pad.2@2942.91,1240.16 R59.1 U1.43 | length 1644.9
  Top Layer w6: pad.0@2903.54,1269.68 2913.39,1269.68 pad.2@2942.91,1240.16
  Bottom Layer w6: U1.43@2818.9,1269.69 pad.0@2903.54,1269.68 ; pad.2@2942.91,1240.16 2992.13,1190.94 2992.13,649.61 2883.86,541.34 2883.86,413.39 2904.86,392.38 3070.66,392.38 3116.83,346.21 3116.83,206.69 R59.1@3078.74,206.69 3031.28,159.23 3031.28,112.93 3000.08,81.73 NPN44.1@3000.08,61.02
DS18B20: DS.2 pad.17@2629,1505 pad.19@2577,1701 R62.1 U1.29 | length 954.9
  Top Layer w6: pad.19@2577,1701 2577,1605 2629,1553 pad.17@2629,1505
  Bottom Layer w6: DS.2@2041,1956 2043,1954 2043,1896.4 R62.1@2082.4,1857 2209,1857 2297,1769 2509,1769 pad.19@2577,1701 ; U1.29@2627.95,1440.94 pad.17@2627.95,1502.95
G: NPN42.2 pad.6@750,1330 pad.9@1810,1330 pad.12@3480,1330 pad.15@4550,1330 pad.30@2525,420 pad.39@1228.35,513.78 pad.42@1564,588 pad.46@4091.54,830.71 pad.49@3835.63,582.68 pad.52@2814.96,587.36 pad.54@2764.76,607.28 RGB1.2 RGB2.2 RGB3.2 RGB4.2 | length 8919.4
  Top Layer w6: pad.6@750,1330 744.29,1330 625,1210.71 625,846.21 593.79,815 388.31,815 342.58,769.26 342.58,687.43 440.68,589.33 734.23,589.33 813.91,509.65 1224.22,509.65 pad.39@1228.35,513.78 ; pad.9@1810,1330 1807.29,1330 1695,1217.71 1695,846.21 1663.79,815 1451.31,815 1405.57,769.26 1405.57,670.43 1491.35,584.65 1800.81,584.65 1871.91,513.54 2216.77,513.54 2313.74,416.57 2340.5,416.57 2341.25,417.32 2503.94,417.32 pad.30@2525,420 2574.53,420 2969.53,815 3253.79,815 3285,846.21 3285,1201.41 3413.59,1330 pad.12@3480,1330 ; pad.52@2814.96,587.36 3413.37,587.36 3490.73,510 3640,510 3712.68,582.68 pad.49@3835.63,582.68 ; pad.46@4091.54,830.71 4320.87,830.71 4355,864.84 4355,1216.21 4455.66,1316.87 4536.87,1316.87 pad.15@4550,1330
  Bottom Layer w6: pad.39@1228.35,513.78 1432.78,513.78 1507,588 pad.42@1564,588 ; NPN42.2@2331.26,62.6 2474.02,62.6 2541.8,130.38 2542.15,402.81 pad.30@2525,420 ; pad.54@2764.76,607.28 2784.69,587.36 pad.52@2814.96,587.36 ; pad.49@3837.22,584.27 3841.77,579.72 3893.16,579.72 4083.5,770.07 4083.5,822.67 pad.46@4091.54,830.71
G_CTRL: NPN42.1 pad.2@2585,1031 pad.6@2398,476 R55.1 U1.10 | length 1096.6
  Top Layer w6: pad.6@2406,474 2406,484 2532,610 2532,806 2585,859 pad.2@2585,1031
  Bottom Layer w6: NPN42.1@2331.26,137.4 2327.4,141.26 R55.1@2327.4,210 2395,277.6 2395,305.3 2407,317.3 2407,467 pad.6@2398,476 ; pad.2@2585,1031 2588.58,1034.58 U1.10@2588.58,1118.11